# EAGLE board Panel (2) (EAGLE 9.1.2)
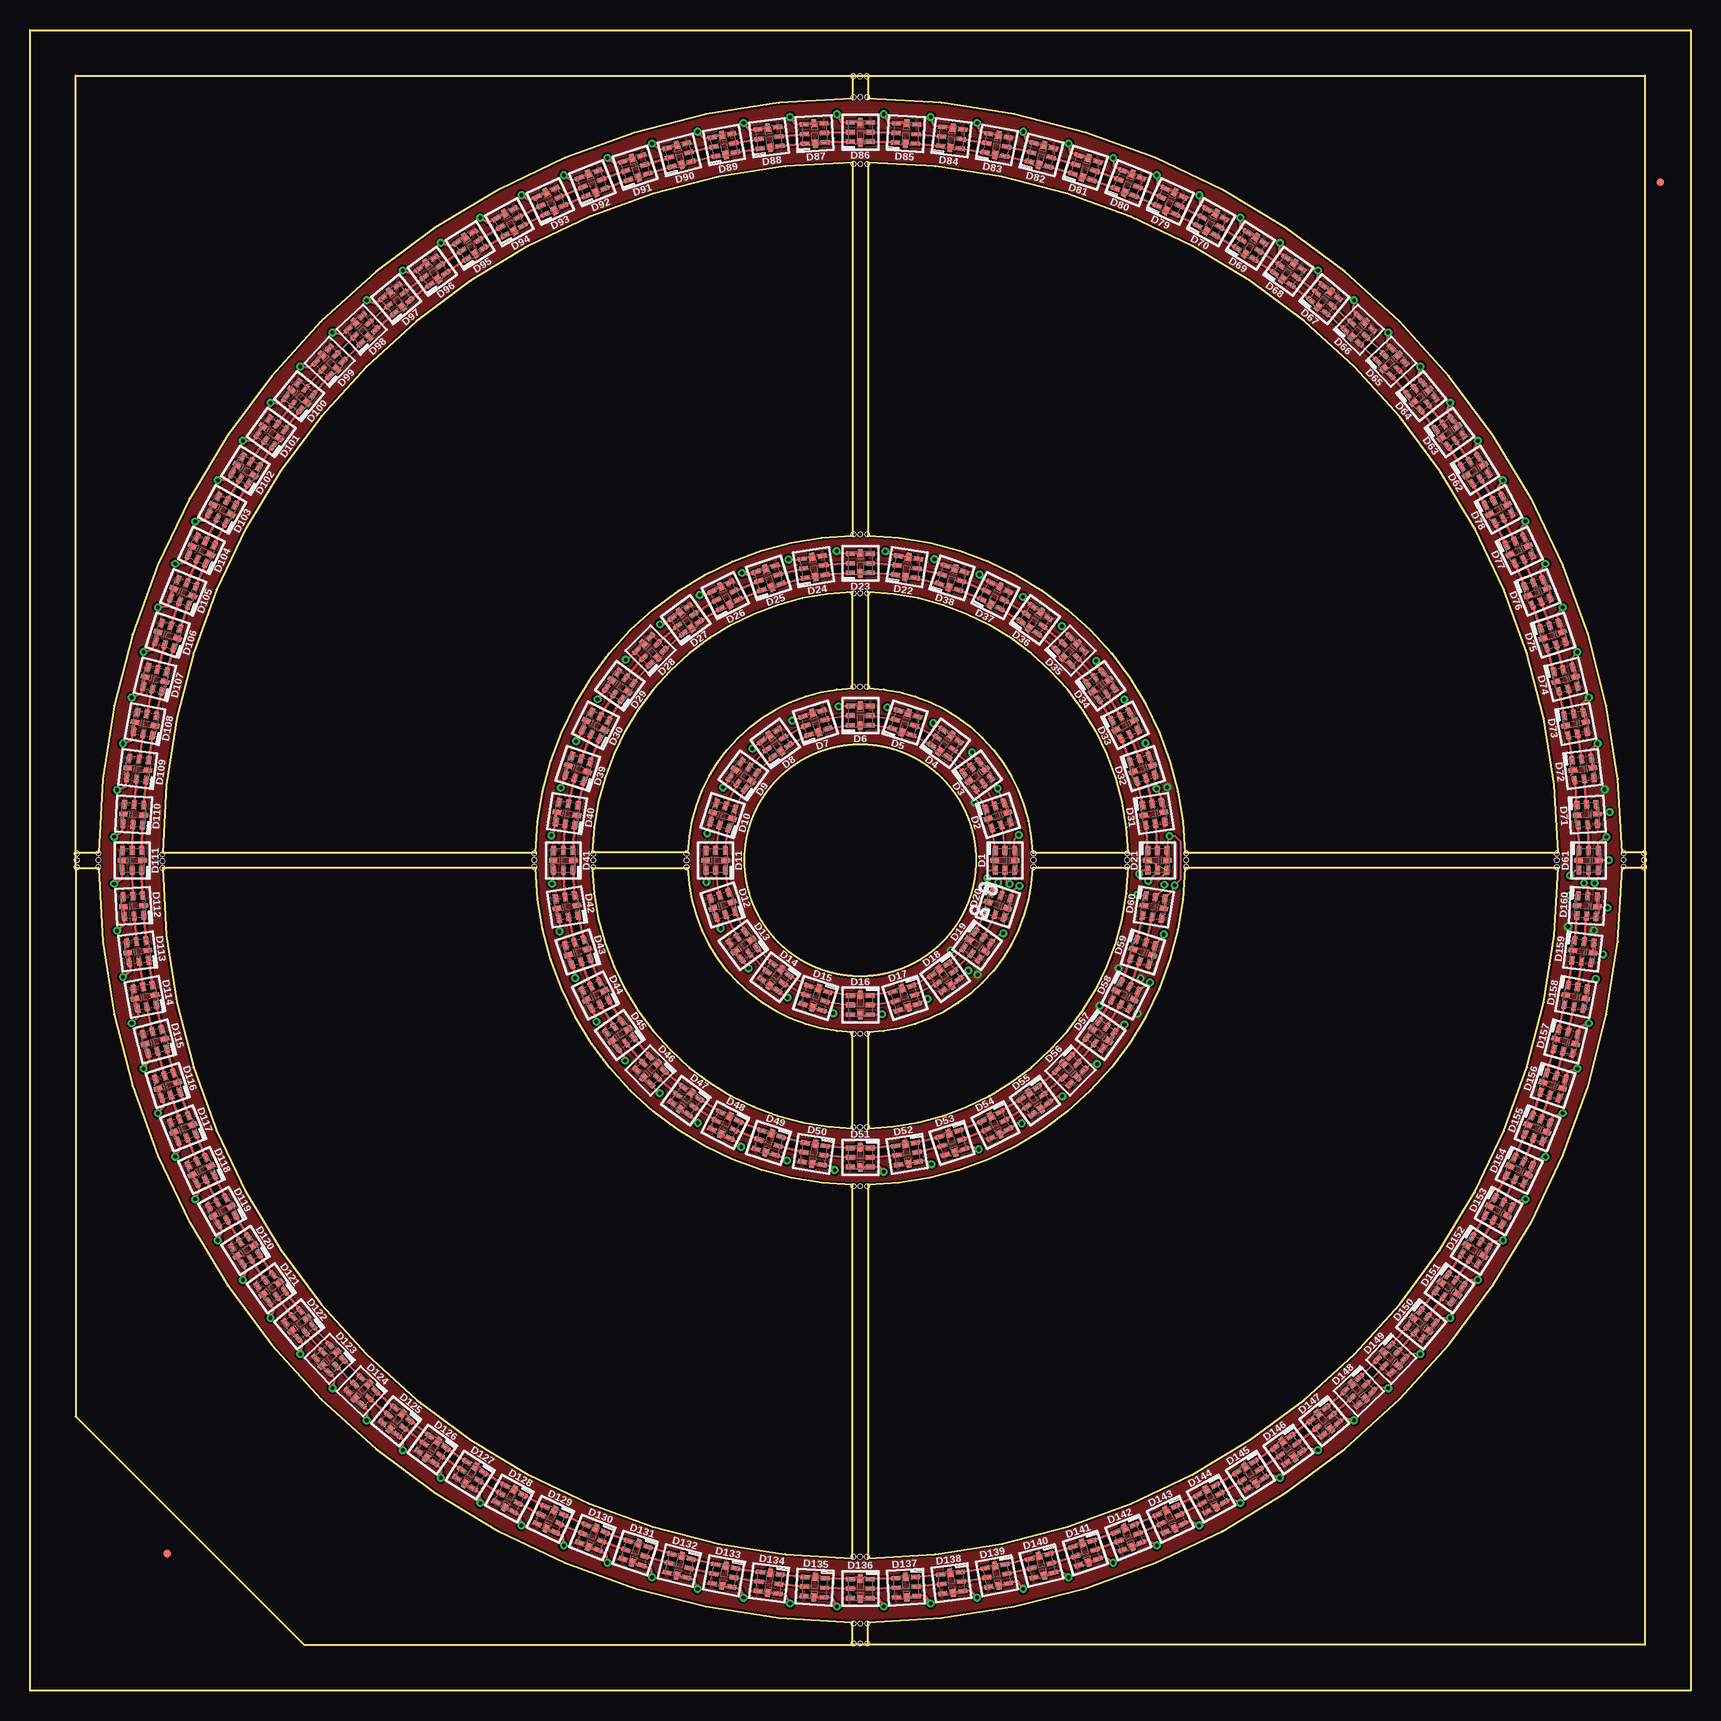
[diagram p0: board, top side]
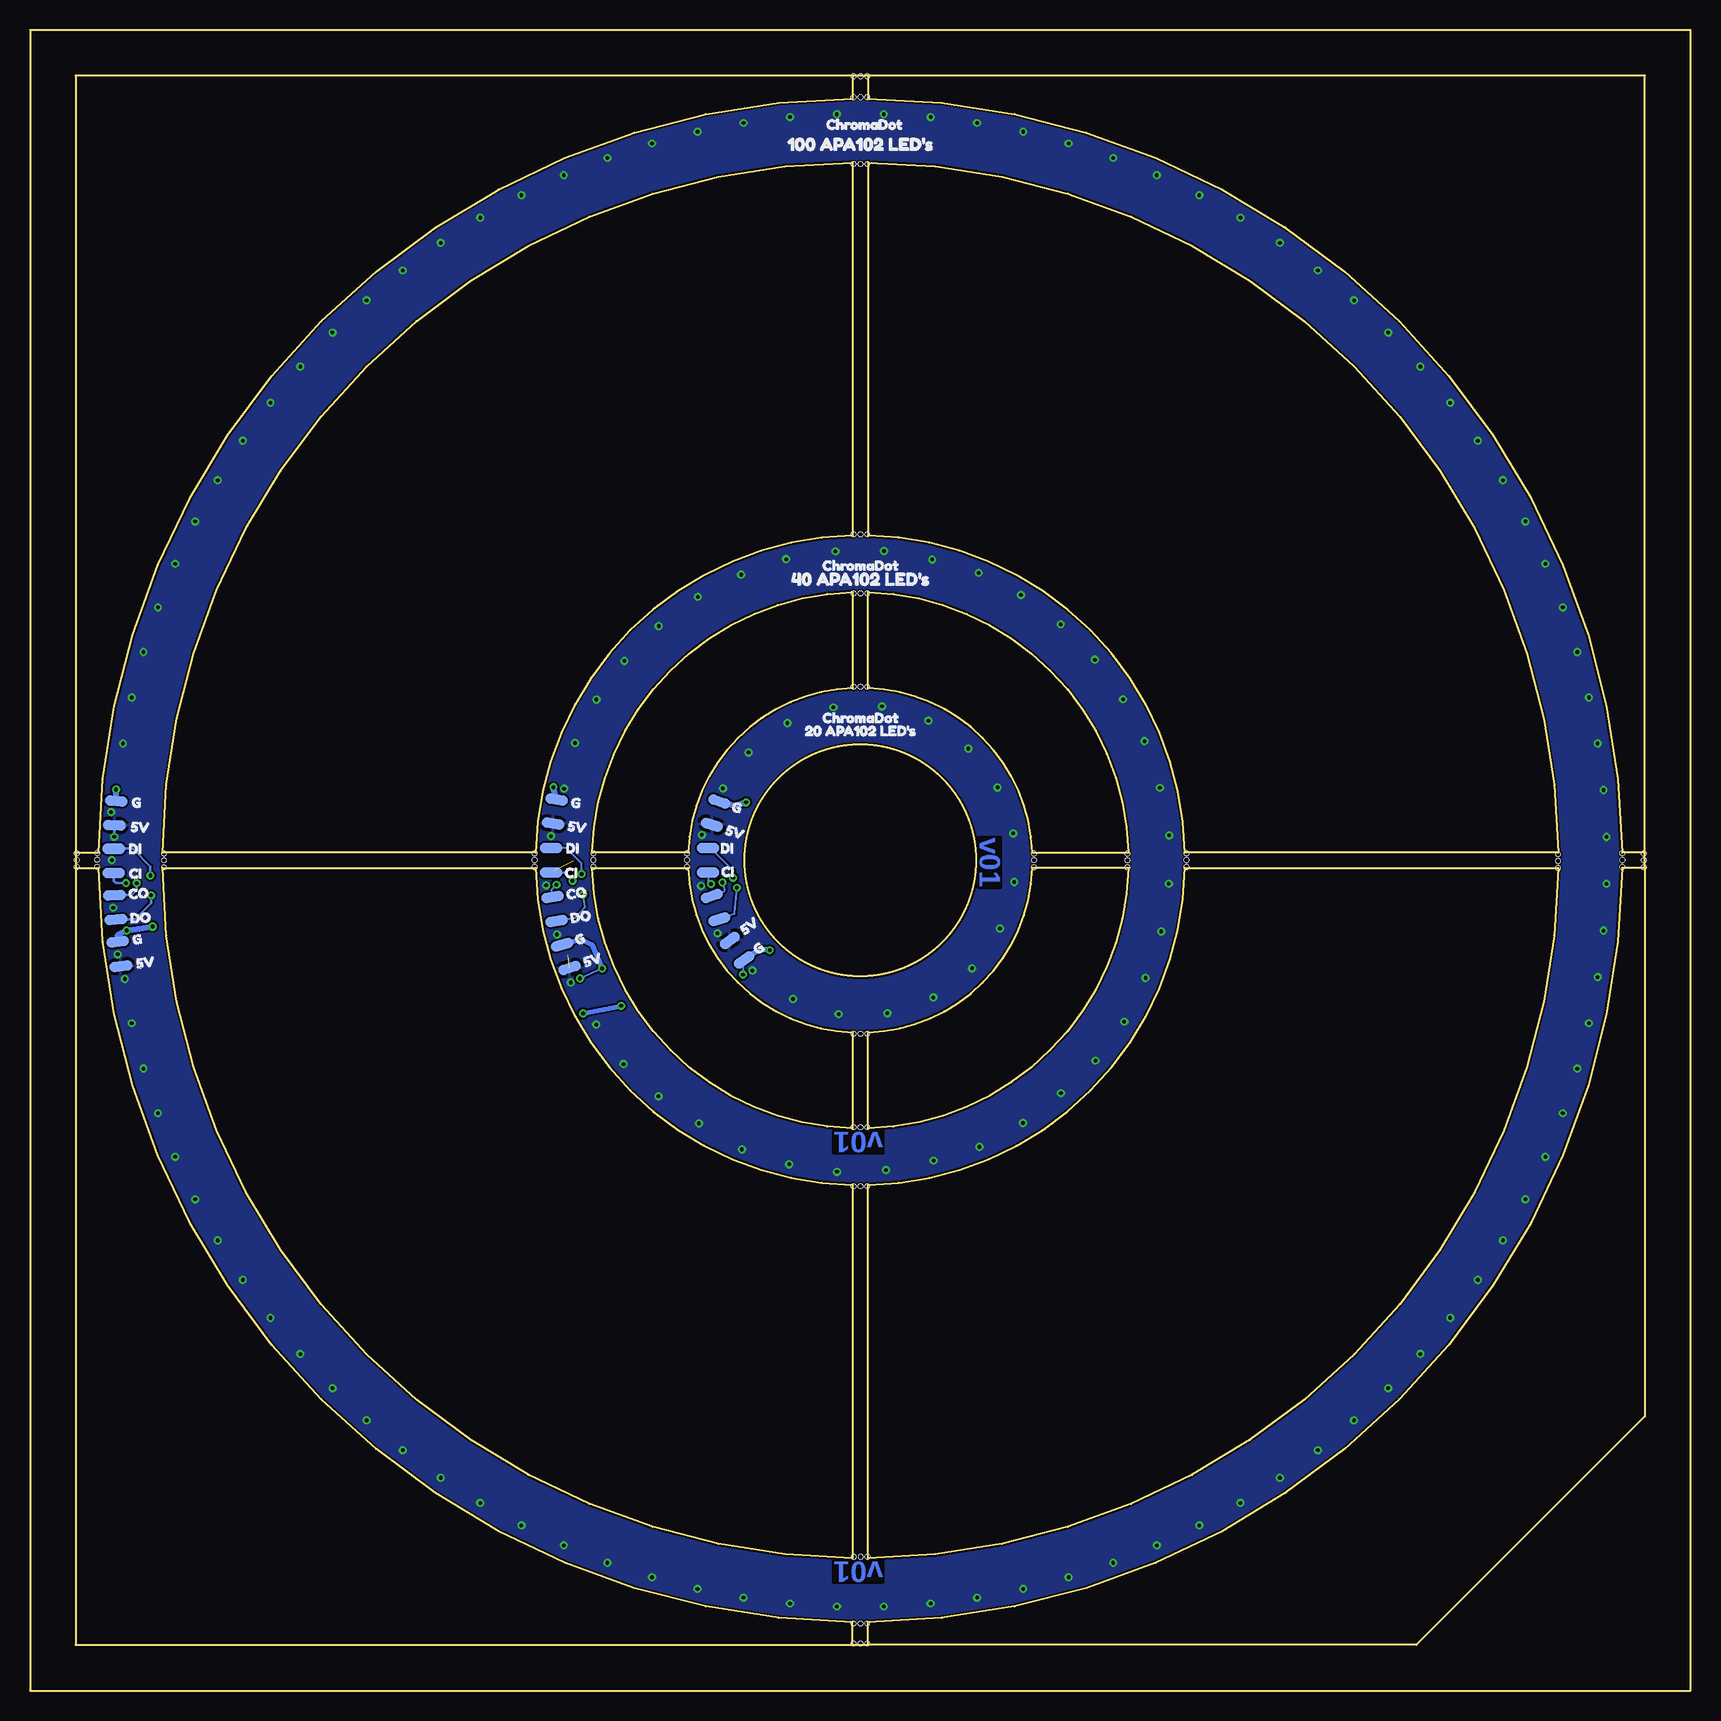
[diagram p1: board, bottom side, seen from below]

Size 138.43 x 138.43 mm. Coordinates in mm from the lower left corner, seen from the top.
Outline: 3.81,68.58 3.81,69.85
Outline: 3.81,69.85 3.81,134.62 68.58,134.62
Outline: 68.58,134.62 69.85,134.62
Outline: 69.85,134.62 134.62,134.62 134.62,69.85
Outline: 134.62,69.85 134.62,68.58
Outline: 134.62,68.58 134.62,3.81 69.85,3.81
Outline: 69.85,3.81 68.58,3.81
Outline: 3.81,69.85 5.71,69.85 arc-89 68.58,132.72 68.58,134.62
Outline: 3.81,68.58 5.71,68.58 arc89 68.58,5.71 68.58,3.81
Outline: 69.85,134.62 69.85,132.72 arc-89 132.72,69.85 134.62,69.85
Outline: 134.62,68.58 132.72,68.58 arc-89 69.85,5.71 69.85,3.81
Outline: 3.81,68.58 3.81,22.86 22.86,3.81 68.58,3.81
Outline: 0,138.43 138.43,138.43 138.43,0 0,0 0,138.43
Outline: 68.58,127.38 68.58,96.27 arc88 42.16,69.85 11.05,69.85 arc-89 68.58,127.38
Outline: 69.85,127.38 69.85,96.27 arc-88 96.27,69.85 127.38,69.85 arc89 69.85,127.38
Outline: 68.58,11.05 68.58,42.16 arc-88 42.16,68.58 11.05,68.58 arc89 68.58,11.05
Outline: 69.85,42.16 69.85,11.05 arc89 127.38,68.58 96.27,68.58 arc-88 69.85,42.16
Outline: 68.58,46.86 68.58,54.86 arc-86 54.86,68.58 46.86,68.58 arc87 68.58,46.86
Outline: 69.85,54.86 69.85,46.86 arc87 91.57,68.58 83.57,68.58 arc-86 69.85,54.86
Outline: 68.58,83.57 68.58,91.57 arc87 46.86,69.85 54.86,69.85 arc-86 68.58,83.57
Outline: 69.85,91.57 69.85,83.57 arc-86 83.57,69.85 91.57,69.85 arc87 69.85,91.57
Outline: circle at 69.22,69.22 radius 9.65
Copper layers (1*16): Top 0.035mm / dielectric 1.5mm / Bottom 0.035mm
Design rules "SparkFun-2-layer-PCBWay-LIMIT": minimum track width 6mil, minimum drill 0.3mm, track to track 6mil, track to pad 6mil, pad to pad 6mil, via to via 6mil, smd to smd 6mil, copper to edge 6mil, drill to drill 6mil, minimum pad ring 7mil, minimum via ring 7mil, stop-mask expansion 4mil, vias tented up to drill 25mil, thermal gap 10mil
Holes 0.38 mm at 11.05,69.72 11.05,69.16 11.05,68.58 5.7,69.8 5.7,69.24 5.7,68.66 42.04,69.8 42.04,69.24 42.04,68.66 46.95,69.79 46.95,69.23 46.95,68.64 54.74,69.79 54.74,69.23 54.74,68.64 83.65,69.8 83.65,69.24 83.65,68.66 91.47,69.8 91.47,69.24 91.47,68.66 96.37,69.8 96.37,69.24 96.37,68.66 127.27,69.79 127.27,69.23 127.27,68.64 132.83,69.82 132.83,69.27 132.83,68.68 134.54,69.8 134.54,69.24 134.54,68.66 68.64,54.76 69.2,54.76 69.79,54.76 68.63,46.96 69.19,46.96 69.77,46.96 68.64,42.05 69.2,42.05 69.79,42.05 68.62,11.15 69.18,11.15 69.76,11.15 68.64,5.6 69.2,5.6 69.79,5.6 68.64,3.94 69.2,3.94 69.79,3.94 3.9,69.77 3.9,69.22 3.9,68.63 68.63,83.68 69.19,83.68 69.77,83.68 68.64,91.47 69.2,91.47 69.79,91.47 68.64,96.39 69.2,96.39 69.79,96.39 68.64,127.27 69.2,127.27 69.79,127.27 68.64,132.83 69.2,132.83 69.79,132.83 68.63,134.57 69.19,134.57 69.77,134.57

## Footprints (pad centres in the part's own frame; a part is rotated, then mirrored left to right if it is on the bottom)
APA102-2020 = smd 0.7 x 0.4: CKI -0.85,0; CKO 0.85,0; GND -0.85,-0.8; SDI -0.85,0.8; SDO 0.85,0.8; VDD 0.85,-0.8 | smd 0.4 x 0.7: GNDPAD 0,0.85; VDDPAD 0,-0.85
FIDUCIAL-MICRO = smd 0.635 x 0.635: 1 0,0
DOUBLELEDPAD = smd 0.889 x 1.905: P$1 -1.016,0; P$2 1.016,0

## Placement (x,y rotation side)
D1  APA1022020  [APA102-2020]  81.28,69.22 90 top
D2  APA1022020  [APA102-2020]  80.7,72.95 108 top
D3  APA1022020  [APA102-2020]  78.97,76.3 126 top
D4  APA1022020  [APA102-2020]  76.3,78.97 144 top
D5  APA1022020  [APA102-2020]  72.95,80.7 162 top
D6  APA1022020  [APA102-2020]  69.22,81.28 180 top
D7  APA1022020  [APA102-2020]  65.48,80.7 198 top
D8  APA1022020  [APA102-2020]  62.13,78.97 216 top
D9  APA1022020  [APA102-2020]  59.46,76.3 234 top
D10  APA1022020  [APA102-2020]  57.73,72.95 252 top
D11  APA1022020  [APA102-2020]  57.15,69.22 270 top
D12  APA1022020  [APA102-2020]  57.73,65.48 288 top
D13  APA1022020  [APA102-2020]  59.46,62.13 306 top
D14  APA1022020  [APA102-2020]  62.13,59.46 324 top
D15  APA1022020  [APA102-2020]  65.48,57.73 342 top
D16  APA1022020  [APA102-2020]  69.22,57.15 0 top
D17  APA1022020  [APA102-2020]  72.95,57.73 18 top
D18  APA1022020  [APA102-2020]  76.3,59.46 36 top
D19  APA1022020  [APA102-2020]  78.97,62.13 54 top
D20  APA1022020  [APA102-2020]  80.7,65.48 72 top
D21  APA1022020  [APA102-2020]  93.98,69.22 90 top
D22  APA1022020  [APA102-2020]  73.1,93.68 171 top
D23  APA1022020  [APA102-2020]  69.22,93.98 180 top
D24  APA1022020  [APA102-2020]  65.33,93.68 189 top
D25  APA1022020  [APA102-2020]  61.57,92.76 198 top
D26  APA1022020  [APA102-2020]  57.96,91.29 207 top
D27  APA1022020  [APA102-2020]  54.66,89.26 216 top
D28  APA1022020  [APA102-2020]  51.71,86.72 225 top
D29  APA1022020  [APA102-2020]  49.17,83.77 234 top
D30  APA1022020  [APA102-2020]  47.14,80.47 243 top
D31  APA1022020  [APA102-2020]  93.68,73.1 99 top
D32  APA1022020  [APA102-2020]  92.76,76.86 108 top
D33  APA1022020  [APA102-2020]  91.29,80.47 117 top
D34  APA1022020  [APA102-2020]  89.26,83.77 126 top
D35  APA1022020  [APA102-2020]  86.72,86.72 135 top
D36  APA1022020  [APA102-2020]  83.77,89.26 144 top
D37  APA1022020  [APA102-2020]  80.47,91.29 153 top
D38  APA1022020  [APA102-2020]  76.86,92.76 162 top
D39  APA1022020  [APA102-2020]  45.67,76.86 252 top
D40  APA1022020  [APA102-2020]  44.75,73.1 261 top
D41  APA1022020  [APA102-2020]  44.45,69.22 270 top
D42  APA1022020  [APA102-2020]  44.75,65.33 279 top
D43  APA1022020  [APA102-2020]  45.67,61.57 288 top
D44  APA1022020  [APA102-2020]  47.14,57.96 297 top
D45  APA1022020  [APA102-2020]  49.17,54.66 306 top
D46  APA1022020  [APA102-2020]  51.71,51.71 315 top
D47  APA1022020  [APA102-2020]  54.66,49.17 324 top
D48  APA1022020  [APA102-2020]  57.96,47.14 333 top
D49  APA1022020  [APA102-2020]  61.57,45.67 342 top
D50  APA1022020  [APA102-2020]  65.33,44.75 351 top
D51  APA1022020  [APA102-2020]  69.22,44.45 0 top
D52  APA1022020  [APA102-2020]  73.1,44.75 9 top
D53  APA1022020  [APA102-2020]  76.86,45.67 18 top
D54  APA1022020  [APA102-2020]  80.47,47.14 27 top
D55  APA1022020  [APA102-2020]  83.77,49.17 36 top
D56  APA1022020  [APA102-2020]  86.72,51.71 45 top
D57  APA1022020  [APA102-2020]  89.26,54.66 54 top
D58  APA1022020  [APA102-2020]  91.29,57.96 63 top
D59  APA1022020  [APA102-2020]  92.76,61.57 72 top
D60  APA1022020  [APA102-2020]  93.68,65.33 81 top
D61  APA1022020  [APA102-2020]  129.92,69.22 90 top
D62  APA1022020  [APA102-2020]  120.47,101.74 122.4 top
D63  APA1022020  [APA102-2020]  118.33,104.9 126 top
D64  APA1022020  [APA102-2020]  115.99,107.91 129.6 top
D65  APA1022020  [APA102-2020]  113.47,110.77 133.2 top
D66  APA1022020  [APA102-2020]  110.77,113.47 136.8 top
D67  APA1022020  [APA102-2020]  107.91,115.99 140.4 top
D68  APA1022020  [APA102-2020]  104.9,118.33 144 top
D69  APA1022020  [APA102-2020]  101.74,120.47 147.6 top
D70  APA1022020  [APA102-2020]  98.46,122.41 151.2 top
D71  APA1022020  [APA102-2020]  129.8,73.03 93.6 top
D72  APA1022020  [APA102-2020]  129.44,76.82 97.2 top
D73  APA1022020  [APA102-2020]  128.85,80.59 100.8 top
D74  APA1022020  [APA102-2020]  128.01,84.31 104.4 top
D75  APA1022020  [APA102-2020]  126.95,87.98 108 top
D76  APA1022020  [APA102-2020]  125.66,91.56 111.6 top
D77  APA1022020  [APA102-2020]  124.14,95.06 115.2 top
D78  APA1022020  [APA102-2020]  122.41,98.46 118.8 top
D79  APA1022020  [APA102-2020]  95.06,124.14 154.8 top
D80  APA1022020  [APA102-2020]  91.56,125.66 158.4 top
D81  APA1022020  [APA102-2020]  87.98,126.95 162 top
D82  APA1022020  [APA102-2020]  84.31,128.01 165.6 top
D83  APA1022020  [APA102-2020]  80.59,128.85 169.2 top
D84  APA1022020  [APA102-2020]  76.82,129.44 172.8 top
D85  APA1022020  [APA102-2020]  73.03,129.8 176.4 top
D86  APA1022020  [APA102-2020]  69.22,129.92 180 top
D87  APA1022020  [APA102-2020]  65.4,129.8 183.6 top
D88  APA1022020  [APA102-2020]  61.61,129.44 187.2 top
D89  APA1022020  [APA102-2020]  57.84,128.85 190.8 top
D90  APA1022020  [APA102-2020]  54.12,128.01 194.4 top
D91  APA1022020  [APA102-2020]  50.45,126.95 198 top
D92  APA1022020  [APA102-2020]  46.87,125.66 201.6 top
D93  APA1022020  [APA102-2020]  43.37,124.14 205.2 top
D94  APA1022020  [APA102-2020]  39.97,122.41 208.8 top
D95  APA1022020  [APA102-2020]  36.69,120.47 212.4 top
D96  APA1022020  [APA102-2020]  33.53,118.33 216 top
D97  APA1022020  [APA102-2020]  30.52,115.99 219.6 top
D98  APA1022020  [APA102-2020]  27.66,113.47 223.2 top
D99  APA1022020  [APA102-2020]  24.96,110.77 226.8 top
D100  APA1022020  [APA102-2020]  22.44,107.91 230.4 top
D101  APA1022020  [APA102-2020]  20.1,104.9 234 top
D102  APA1022020  [APA102-2020]  17.96,101.74 237.6 top
D103  APA1022020  [APA102-2020]  16.02,98.46 241.2 top
D104  APA1022020  [APA102-2020]  14.29,95.06 244.8 top
D105  APA1022020  [APA102-2020]  12.77,91.56 248.4 top
D106  APA1022020  [APA102-2020]  11.48,87.98 252 top
D107  APA1022020  [APA102-2020]  10.42,84.31 255.6 top
D108  APA1022020  [APA102-2020]  9.58,80.59 259.2 top
D109  APA1022020  [APA102-2020]  8.99,76.82 262.8 top
D110  APA1022020  [APA102-2020]  8.63,73.03 266.4 top
D111  APA1022020  [APA102-2020]  8.51,69.22 270 top
D112  APA1022020  [APA102-2020]  8.63,65.4 273.6 top
D113  APA1022020  [APA102-2020]  8.99,61.61 277.2 top
D114  APA1022020  [APA102-2020]  9.58,57.84 280.8 top
D115  APA1022020  [APA102-2020]  10.42,54.12 284.4 top
D116  APA1022020  [APA102-2020]  11.48,50.45 288 top
D117  APA1022020  [APA102-2020]  12.77,46.87 291.6 top
D118  APA1022020  [APA102-2020]  14.29,43.37 295.2 top
D119  APA1022020  [APA102-2020]  16.02,39.97 298.8 top
D120  APA1022020  [APA102-2020]  17.96,36.69 302.4 top
D121  APA1022020  [APA102-2020]  20.1,33.53 306 top
D122  APA1022020  [APA102-2020]  22.44,30.52 309.6 top
D123  APA1022020  [APA102-2020]  24.96,27.66 313.2 top
D124  APA1022020  [APA102-2020]  27.66,24.96 316.8 top
D125  APA1022020  [APA102-2020]  30.52,22.44 320.4 top
D126  APA1022020  [APA102-2020]  33.53,20.1 324 top
D127  APA1022020  [APA102-2020]  36.69,17.96 327.6 top
D128  APA1022020  [APA102-2020]  39.97,16.02 331.2 top
D129  APA1022020  [APA102-2020]  43.37,14.29 334.8 top
D130  APA1022020  [APA102-2020]  46.87,12.77 338.4 top
D131  APA1022020  [APA102-2020]  50.45,11.48 342 top
D132  APA1022020  [APA102-2020]  54.12,10.42 345.6 top
D133  APA1022020  [APA102-2020]  57.84,9.58 349.2 top
D134  APA1022020  [APA102-2020]  61.61,8.99 352.8 top
D135  APA1022020  [APA102-2020]  65.4,8.63 356.4 top
D136  APA1022020  [APA102-2020]  69.22,8.51 0 top
D137  APA1022020  [APA102-2020]  73.03,8.63 3.6 top
D138  APA1022020  [APA102-2020]  76.82,8.99 7.2 top
D139  APA1022020  [APA102-2020]  80.59,9.58 10.8 top
D140  APA1022020  [APA102-2020]  84.31,10.42 14.4 top
D141  APA1022020  [APA102-2020]  87.98,11.48 18 top
D142  APA1022020  [APA102-2020]  91.56,12.77 21.6 top
D143  APA1022020  [APA102-2020]  95.06,14.29 25.2 top
D144  APA1022020  [APA102-2020]  98.46,16.02 28.8 top
D145  APA1022020  [APA102-2020]  101.74,17.96 32.4 top
D146  APA1022020  [APA102-2020]  104.9,20.1 36 top
D147  APA1022020  [APA102-2020]  107.91,22.44 39.6 top
D148  APA1022020  [APA102-2020]  110.77,24.96 43.2 top
D149  APA1022020  [APA102-2020]  113.47,27.66 46.8 top
D150  APA1022020  [APA102-2020]  115.99,30.52 50.4 top
D151  APA1022020  [APA102-2020]  118.33,33.53 54 top
D152  APA1022020  [APA102-2020]  120.47,36.69 57.6 top
D153  APA1022020  [APA102-2020]  122.41,39.97 61.2 top
D154  APA1022020  [APA102-2020]  124.14,43.37 64.8 top
D155  APA1022020  [APA102-2020]  125.66,46.87 68.4 top
D156  APA1022020  [APA102-2020]  126.95,50.45 72 top
D157  APA1022020  [APA102-2020]  128.01,54.12 75.6 top
D158  APA1022020  [APA102-2020]  128.85,57.84 79.2 top
D159  APA1022020  [APA102-2020]  129.44,61.61 82.8 top
D160  APA1022020  [APA102-2020]  129.8,65.4 86.4 top
E$1  [FIDUCIAL-MICRO]  135.89,125.73 0 top
E$2  [FIDUCIAL-MICRO]  11.43,11.43 0 top
FRAME3  FRAME-LETTER  [CREATIVE_COMMONS]  44.3,-7.3 0 top  (outside the outline)
J1  DOUBLE_LED_PAD  [DOUBLELEDPAD]  81.28,73.15 252 bottom
J2  DOUBLE_LED_PAD  [DOUBLELEDPAD]  81.92,69.22 270 bottom
J3  DOUBLE_LED_PAD  [DOUBLELEDPAD]  79.5,61.72 126 bottom
J4  DOUBLE_LED_PAD  [DOUBLELEDPAD]  81.28,65.28 108 bottom
J5  DOUBLE_LED_PAD  [DOUBLELEDPAD]  94.68,73.28 261 bottom
J6  DOUBLE_LED_PAD  [DOUBLELEDPAD]  95,69.23 270 bottom
J7  DOUBLE_LED_PAD  [DOUBLELEDPAD]  94.7,65.15 99 bottom
J8  DOUBLE_LED_PAD  [DOUBLELEDPAD]  93.76,61.21 288 bottom
J9  DOUBLE_LED_PAD  [DOUBLELEDPAD]  131.32,73.15 266.4 bottom
J10  DOUBLE_LED_PAD  [DOUBLELEDPAD]  131.44,69.16 270 bottom
J11  DOUBLE_LED_PAD  [DOUBLELEDPAD]  130.98,61.4 277.2 bottom
J12  DOUBLE_LED_PAD  [DOUBLELEDPAD]  131.33,65.3 93.6 bottom
U$1  [CHROMADOT5]  73.09,81.09 0 bottom
U$2  [20_APA102_LED#S6]  74.55,80.01 0 bottom
U$3  [5V6]  79.69,62.86 36 bottom
U$4  [5V6]  81.09,72.01 342 bottom
U$5  [G4]  80.58,73.98 342 bottom
U$6  [G4]  78.61,61.21 36 bottom
U$7  [DO3]  80.65,64.45 162 top
U$8  [CO1]  81.34,66.36 162 top
U$9  [CI6]  81.53,68.26 0 bottom
U$10  [DI4]  81.6,70.23 0 bottom
U$11  [CHROMADOT5]  73.09,93.79 0 bottom
U$12  [5V6]  92.96,60.45 18 bottom
U$13  [5V6]  94.3,72.2 352 bottom
U$14  [G4]  94.04,74.17 352 bottom
U$15  [G4]  93.66,62.29 18 bottom
U$16  [DO3]  94.11,64.26 9 bottom
U$17  [CO1]  94.42,66.23 9 bottom
U$18  [CI6]  94.59,68.17 0 bottom
U$19  [DI4]  94.49,70.23 0 bottom
U$20  [40_APA102_LED#S1]  75.88,92.65 0 bottom
U$21  [CHROMADOT5]  72.77,130.56 0 bottom
U$22  [5V6]  130.3,60.52 7.2 bottom
U$23  [5V6]  130.75,72.07 356.4 bottom
U$24  [G4]  130.68,74.1 356.4 bottom
U$25  [G4]  130.62,62.48 7.2 bottom
U$26  [DO3]  130.81,64.33 3.6 bottom
U$27  [CO1]  130.94,66.36 3.6 bottom
U$28  [CI6]  130.91,68.11 0 bottom
U$29  [DI4]  130.94,70.17 0 bottom
U$30  [100_APA102_LED#S0]  76.2,128.91 0 bottom

## Library data of the parts
D1-D160 = SparkFun-LED; PROD_ID: DIO-13883
E$1 E$2 FRAME3 = SparkFun-Aesthetics
J1-J12 = Andy
U$1 U$2 U$11 U$21 = buzzard_labels (22)
U$3-U$8 U$12-U$17 U$22-U$27 = buzzard_labels (25)
U$9 U$10 U$18 U$19 U$28 U$29 = buzzard_labels (26)
U$20 U$30 = buzzard_labels (28)

## Nets
5V: D1.VDD D1.VDDPAD D2.VDD D2.VDDPAD D3.VDD D3.VDDPAD D4.VDD D4.VDDPAD D5.VDD D5.VDDPAD D6.VDD D6.VDDPAD D7.VDD D7.VDDPAD D8.VDD D8.VDDPAD D9.VDD D9.VDDPAD D10.VDD D10.VDDPAD D11.VDD D11.VDDPAD D12.VDD D12.VDDPAD D13.VDD D13.VDDPAD D14.VDD D14.VDDPAD D15.VDD D15.VDDPAD D16.VDD D16.VDDPAD D17.VDD D17.VDDPAD D18.VDD D18.VDDPAD D19.VDD D19.VDDPAD D20.VDD D20.VDDPAD J1.P$2 J3.P$2
5V1: D21.VDD D21.VDDPAD D22.VDD D22.VDDPAD D23.VDD D23.VDDPAD D24.VDD D24.VDDPAD D25.VDD D25.VDDPAD D26.VDD D26.VDDPAD D27.VDD D27.VDDPAD D28.VDD D28.VDDPAD D29.VDD D29.VDDPAD D30.VDD D30.VDDPAD D31.VDD D31.VDDPAD D32.VDD D32.VDDPAD D33.VDD D33.VDDPAD D34.VDD D34.VDDPAD D35.VDD D35.VDDPAD D36.VDD D36.VDDPAD D37.VDD D37.VDDPAD D38.VDD D38.VDDPAD D39.VDD D39.VDDPAD D40.VDD D40.VDDPAD D41.VDD D41.VDDPAD D42.VDD D42.VDDPAD D43.VDD D43.VDDPAD D44.VDD D44.VDDPAD D45.VDD D45.VDDPAD D46.VDD D46.VDDPAD D47.VDD D47.VDDPAD D48.VDD D48.VDDPAD D49.VDD D49.VDDPAD D50.VDD D50.VDDPAD D51.VDD D51.VDDPAD D52.VDD D52.VDDPAD D53.VDD D53.VDDPAD D54.VDD D54.VDDPAD D55.VDD D55.VDDPAD D56.VDD D56.VDDPAD D57.VDD D57.VDDPAD D58.VDD D58.VDDPAD D59.VDD D59.VDDPAD D60.VDD D60.VDDPAD J5.P$2 J8.P$2
5V2: D61.VDD D61.VDDPAD D62.VDD D62.VDDPAD D63.VDD D63.VDDPAD D64.VDD D64.VDDPAD D65.VDD D65.VDDPAD D66.VDD D66.VDDPAD D67.VDD D67.VDDPAD D68.VDD D68.VDDPAD D69.VDD D69.VDDPAD D70.VDD D70.VDDPAD D71.VDD D71.VDDPAD D72.VDD D72.VDDPAD D73.VDD D73.VDDPAD D74.VDD D74.VDDPAD D75.VDD D75.VDDPAD D76.VDD D76.VDDPAD D77.VDD D77.VDDPAD D78.VDD D78.VDDPAD D79.VDD D79.VDDPAD D80.VDD D80.VDDPAD D81.VDD D81.VDDPAD D82.VDD D82.VDDPAD D83.VDD D83.VDDPAD D84.VDD D84.VDDPAD D85.VDD D85.VDDPAD D86.VDD D86.VDDPAD D87.VDD D87.VDDPAD D88.VDD D88.VDDPAD D89.VDD D89.VDDPAD D90.VDD D90.VDDPAD D91.VDD D91.VDDPAD D92.VDD D92.VDDPAD D93.VDD D93.VDDPAD D94.VDD D94.VDDPAD D95.VDD D95.VDDPAD D96.VDD D96.VDDPAD D97.VDD D97.VDDPAD D98.VDD D98.VDDPAD D99.VDD D99.VDDPAD D100.VDD D100.VDDPAD D101.VDD D101.VDDPAD D102.VDD D102.VDDPAD D103.VDD D103.VDDPAD D104.VDD D104.VDDPAD D105.VDD D105.VDDPAD D106.VDD D106.VDDPAD D107.VDD D107.VDDPAD D108.VDD D108.VDDPAD D109.VDD D109.VDDPAD D110.VDD D110.VDDPAD D111.VDD D111.VDDPAD D112.VDD D112.VDDPAD D113.VDD D113.VDDPAD D114.VDD D114.VDDPAD D115.VDD D115.VDDPAD D116.VDD D116.VDDPAD D117.VDD D117.VDDPAD D118.VDD D118.VDDPAD D119.VDD D119.VDDPAD D120.VDD D120.VDDPAD D121.VDD D121.VDDPAD D122.VDD D122.VDDPAD D123.VDD D123.VDDPAD D124.VDD D124.VDDPAD D125.VDD D125.VDDPAD D126.VDD D126.VDDPAD D127.VDD D127.VDDPAD D128.VDD D128.VDDPAD D129.VDD D129.VDDPAD D130.VDD D130.VDDPAD D131.VDD D131.VDDPAD D132.VDD D132.VDDPAD D133.VDD D133.VDDPAD D134.VDD D134.VDDPAD D135.VDD D135.VDDPAD D136.VDD D136.VDDPAD D137.VDD D137.VDDPAD D138.VDD D138.VDDPAD D139.VDD D139.VDDPAD D140.VDD D140.VDDPAD D141.VDD D141.VDDPAD D142.VDD D142.VDDPAD D143.VDD D143.VDDPAD D144.VDD D144.VDDPAD D145.VDD D145.VDDPAD D146.VDD D146.VDDPAD D147.VDD D147.VDDPAD D148.VDD D148.VDDPAD D149.VDD D149.VDDPAD D150.VDD D150.VDDPAD D151.VDD D151.VDDPAD D152.VDD D152.VDDPAD D153.VDD D153.VDDPAD D154.VDD D154.VDDPAD D155.VDD D155.VDDPAD D156.VDD D156.VDDPAD D157.VDD D157.VDDPAD D158.VDD D158.VDDPAD D159.VDD D159.VDDPAD D160.VDD D160.VDDPAD J9.P$2 J11.P$2
GND: D1.GND D1.GNDPAD D2.GND D2.GNDPAD D3.GND D3.GNDPAD D4.GND D4.GNDPAD D5.GND D5.GNDPAD D6.GND D6.GNDPAD D7.GND D7.GNDPAD D8.GND D8.GNDPAD D9.GND D9.GNDPAD D10.GND D10.GNDPAD D11.GND D11.GNDPAD D12.GND D12.GNDPAD D13.GND D13.GNDPAD D14.GND D14.GNDPAD D15.GND D15.GNDPAD D16.GND D16.GNDPAD D17.GND D17.GNDPAD D18.GND D18.GNDPAD D19.GND D19.GNDPAD D20.GND D20.GNDPAD J1.P$1 J3.P$1
GND1: D21.GND D21.GNDPAD D22.GND D22.GNDPAD D23.GND D23.GNDPAD D24.GND D24.GNDPAD D25.GND D25.GNDPAD D26.GND D26.GNDPAD D27.GND D27.GNDPAD D28.GND D28.GNDPAD D29.GND D29.GNDPAD D30.GND D30.GNDPAD D31.GND D31.GNDPAD D32.GND D32.GNDPAD D33.GND D33.GNDPAD D34.GND D34.GNDPAD D35.GND D35.GNDPAD D36.GND D36.GNDPAD D37.GND D37.GNDPAD D38.GND D38.GNDPAD D39.GND D39.GNDPAD D40.GND D40.GNDPAD D41.GND D41.GNDPAD D42.GND D42.GNDPAD D43.GND D43.GNDPAD D44.GND D44.GNDPAD D45.GND D45.GNDPAD D46.GND D46.GNDPAD D47.GND D47.GNDPAD D48.GND D48.GNDPAD D49.GND D49.GNDPAD D50.GND D50.GNDPAD D51.GND D51.GNDPAD D52.GND D52.GNDPAD D53.GND D53.GNDPAD D54.GND D54.GNDPAD D55.GND D55.GNDPAD D56.GND D56.GNDPAD D57.GND D57.GNDPAD D58.GND D58.GNDPAD D59.GND D59.GNDPAD D60.GND D60.GNDPAD J5.P$1 J8.P$1
GND2: D61.GND D61.GNDPAD D62.GND D62.GNDPAD D63.GND D63.GNDPAD D64.GND D64.GNDPAD D65.GND D65.GNDPAD D66.GND D66.GNDPAD D67.GND D67.GNDPAD D68.GND D68.GNDPAD D69.GND D69.GNDPAD D70.GND D70.GNDPAD D71.GND D71.GNDPAD D72.GND D72.GNDPAD D73.GND D73.GNDPAD D74.GND D74.GNDPAD D75.GND D75.GNDPAD D76.GND D76.GNDPAD D77.GND D77.GNDPAD D78.GND D78.GNDPAD D79.GND D79.GNDPAD D80.GND D80.GNDPAD D81.GND D81.GNDPAD D82.GND D82.GNDPAD D83.GND D83.GNDPAD D84.GND D84.GNDPAD D85.GND D85.GNDPAD D86.GND D86.GNDPAD D87.GND D87.GNDPAD D88.GND D88.GNDPAD D89.GND D89.GNDPAD D90.GND D90.GNDPAD D91.GND D91.GNDPAD D92.GND D92.GNDPAD D93.GND D93.GNDPAD D94.GND D94.GNDPAD D95.GND D95.GNDPAD D96.GND D96.GNDPAD D97.GND D97.GNDPAD D98.GND D98.GNDPAD D99.GND D99.GNDPAD D100.GND D100.GNDPAD D101.GND D101.GNDPAD D102.GND D102.GNDPAD D103.GND D103.GNDPAD D104.GND D104.GNDPAD D105.GND D105.GNDPAD D106.GND D106.GNDPAD D107.GND D107.GNDPAD D108.GND D108.GNDPAD D109.GND D109.GNDPAD D110.GND D110.GNDPAD D111.GND D111.GNDPAD D112.GND D112.GNDPAD D113.GND D113.GNDPAD D114.GND D114.GNDPAD D115.GND D115.GNDPAD D116.GND D116.GNDPAD D117.GND D117.GNDPAD D118.GND D118.GNDPAD D119.GND D119.GNDPAD D120.GND D120.GNDPAD D121.GND D121.GNDPAD D122.GND D122.GNDPAD D123.GND D123.GNDPAD D124.GND D124.GNDPAD D125.GND D125.GNDPAD D126.GND D126.GNDPAD D127.GND D127.GNDPAD D128.GND D128.GNDPAD D129.GND D129.GNDPAD D130.GND D130.GNDPAD D131.GND D131.GNDPAD D132.GND D132.GNDPAD D133.GND D133.GNDPAD D134.GND D134.GNDPAD D135.GND D135.GNDPAD D136.GND D136.GNDPAD D137.GND D137.GNDPAD D138.GND D138.GNDPAD D139.GND D139.GNDPAD D140.GND D140.GNDPAD D141.GND D141.GNDPAD D142.GND D142.GNDPAD D143.GND D143.GNDPAD D144.GND D144.GNDPAD D145.GND D145.GNDPAD D146.GND D146.GNDPAD D147.GND D147.GNDPAD D148.GND D148.GNDPAD D149.GND D149.GNDPAD D150.GND D150.GNDPAD D151.GND D151.GNDPAD D152.GND D152.GNDPAD D153.GND D153.GNDPAD D154.GND D154.GNDPAD D155.GND D155.GNDPAD D156.GND D156.GNDPAD D157.GND D157.GNDPAD D158.GND D158.GNDPAD D159.GND D159.GNDPAD D160.GND D160.GNDPAD J9.P$1 J11.P$1
N$1: D4.CKO D5.CKI
N$2: D1.CKI J2.P$2
N$3: D1.SDI J2.P$1
N$4: D1.CKO D2.CKI
N$5: D1.SDO D2.SDI
N$6: D2.CKO D3.CKI
N$7: D2.SDO D3.SDI
N$8: D3.CKO D4.CKI
N$9: D3.SDO D4.SDI
N$10: D4.SDO D5.SDI
N$11: D5.CKO D6.CKI
N$12: D5.SDO D6.SDI
N$13: D6.CKO D7.CKI
N$14: D6.SDO D7.SDI
N$15: D7.CKO D8.CKI
N$16: D7.SDO D8.SDI
N$17: D8.CKO D9.CKI
N$18: D8.SDO D9.SDI
N$19: D9.CKO D10.CKI
N$20: D9.SDO D10.SDI
N$21: D10.CKO D11.CKI
N$22: D10.SDO D11.SDI
N$23: D11.CKO D12.CKI
N$24: D11.SDO D12.SDI
N$25: D12.CKO D13.CKI
N$26: D12.SDO D13.SDI
N$27: D13.CKO D14.CKI
N$28: D13.SDO D14.SDI
N$29: D14.CKO D15.CKI
N$30: D14.SDO D15.SDI
N$31: D15.CKO D16.CKI
N$32: D15.SDO D16.SDI
N$33: D16.CKO D17.CKI
N$34: D16.SDO D17.SDI
N$35: D17.CKO D18.CKI
N$36: D17.SDO D18.SDI
N$37: D18.CKO D19.CKI
N$38: D18.SDO D19.SDI
N$39: D19.CKO D20.CKI
N$40: D19.SDO D20.SDI
N$41: D20.CKO J4.P$2
N$42: D20.SDO J4.P$1
N$43: D21.CKI J6.P$2
N$44: D21.SDI J6.P$1
N$45: D21.CKO D31.CKI
N$46: D21.SDO D31.SDI
N$47: D31.CKO D32.CKI
N$48: D31.SDO D32.SDI
N$49: D32.CKO D33.CKI
N$50: D32.SDO D33.SDI
N$51: D33.CKO D34.CKI
N$52: D33.SDO D34.SDI
N$53: D34.CKO D35.CKI
N$54: D34.SDO D35.SDI
N$55: D35.CKO D36.CKI
N$56: D35.SDO D36.SDI
N$57: D36.CKO D37.CKI
N$58: D36.SDO D37.SDI
N$59: D22.CKI D38.CKO
N$60: D22.SDI D38.SDO
N$61: D22.CKO D23.CKI
N$62: D22.SDO D23.SDI
N$63: D23.CKO D24.CKI
N$64: D23.SDO D24.SDI
N$65: D24.CKO D25.CKI
N$66: D24.SDO D25.SDI
N$67: D25.CKO D26.CKI
N$68: D25.SDO D26.SDI
N$69: D26.CKO D27.CKI
N$70: D26.SDO D27.SDI
N$71: D27.CKO D28.CKI
N$72: D27.SDO D28.SDI
N$73: D29.CKO D30.CKI
N$74: D29.SDO D30.SDI
N$75: D30.SDO D39.SDI
N$76: D39.CKO D40.CKI
N$77: D39.SDO D40.SDI
N$78: D30.CKO D39.CKI
N$79: D40.CKO D41.CKI
N$80: D40.SDO D41.SDI
N$81: D28.SDO D29.SDI
N$82: D28.CKO D29.CKI
N$83: D37.SDO D38.SDI
N$84: D41.CKO D42.CKI
N$85: D41.SDO D42.SDI
N$86: D42.CKO D43.CKI
N$87: D42.SDO D43.SDI
N$88: D43.CKO D44.CKI
N$89: D43.SDO D44.SDI
N$90: D45.CKO D46.CKI
N$91: D45.SDO D46.SDI
N$92: D46.CKO D47.CKI
N$93: D46.SDO D47.SDI
N$94: D47.CKO D48.CKI
N$95: D47.SDO D48.SDI
N$96: D48.CKO D49.CKI
N$97: D48.SDO D49.SDI
N$98: D49.CKO D50.CKI
N$99: D49.SDO D50.SDI
N$100: D50.CKO D51.CKI
N$101: D50.SDO D51.SDI
N$102: D51.CKO D52.CKI
N$103: D51.SDO D52.SDI
N$104: D53.CKO D54.CKI
N$105: D53.SDO D54.SDI
N$106: D54.CKO D55.CKI
N$107: D54.SDO D55.SDI
N$108: D55.CKO D56.CKI
N$109: D55.SDO D56.SDI
N$110: D56.CKO D57.CKI
N$111: D56.SDO D57.SDI
N$112: D57.CKO D58.CKI
N$113: D57.SDO D58.SDI
N$114: D58.CKO D59.CKI
N$115: D58.SDO D59.SDI
N$116: D59.CKO D60.CKI
N$117: D59.SDO D60.SDI
N$118: D37.CKO D38.CKI
N$119: D44.CKO D45.CKI
N$120: D44.SDO D45.SDI
N$121: D52.SDO D53.SDI
N$122: D52.CKO D53.CKI
N$123: D61.CKI J10.P$2
N$124: D61.SDI J10.P$1
N$125: D61.CKO D71.CKI
N$126: D61.SDO D71.SDI
N$127: D71.CKO D72.CKI
N$128: D71.SDO D72.SDI
N$129: D72.CKO D73.CKI
N$130: D72.SDO D73.SDI
N$131: D73.CKO D74.CKI
N$132: D73.SDO D74.SDI
N$133: D60.CKO J7.P$2
N$134: D60.SDO J7.P$1
N$135: D74.CKO D75.CKI
N$136: D74.SDO D75.SDI
N$137: D75.CKO D76.CKI
N$138: D75.SDO D76.SDI
N$139: D76.CKO D77.CKI
N$140: D76.SDO D77.SDI
N$141: D62.CKI D78.CKO
N$142: D62.SDI D78.SDO
N$143: D62.CKO D63.CKI
N$144: D62.SDO D63.SDI
N$145: D63.CKO D64.CKI
N$146: D63.SDO D64.SDI
N$147: D64.CKO D65.CKI
N$148: D64.SDO D65.SDI
N$149: D65.CKO D66.CKI
N$150: D65.SDO D66.SDI
N$151: D66.CKO D67.CKI
N$152: D66.SDO D67.SDI
N$153: D67.CKO D68.CKI
N$154: D67.SDO D68.SDI
N$155: D69.CKO D70.CKI
N$156: D69.SDO D70.SDI
N$157: D70.SDO D79.SDI
N$158: D79.CKO D80.CKI
N$159: D79.SDO D80.SDI
N$160: D70.CKO D79.CKI
N$161: D77.CKO D78.CKI
N$162: D77.SDO D78.SDI
N$163: D68.SDO D69.SDI
N$164: D68.CKO D69.CKI
N$165: D81.CKO D82.CKI
N$166: D81.SDO D82.SDI
N$167: D82.CKO D83.CKI
N$168: D82.SDO D83.SDI
N$169: D83.CKO D84.CKI
N$170: D83.SDO D84.SDI
N$171: D84.CKO D85.CKI
N$172: D84.SDO D85.SDI
N$173: D85.CKO D86.CKI
N$174: D85.SDO D86.SDI
N$175: D86.CKO D87.CKI
N$176: D86.SDO D87.SDI
N$177: D87.CKO D88.CKI
N$178: D87.SDO D88.SDI
N$179: D89.CKO D90.CKI
N$180: D89.SDO D90.SDI
N$181: D90.CKO D91.CKI
N$182: D90.SDO D91.SDI
N$183: D91.CKO D92.CKI
N$184: D91.SDO D92.SDI
N$185: D92.CKO D93.CKI
N$186: D92.SDO D93.SDI
N$187: D93.CKO D94.CKI
N$188: D93.SDO D94.SDI
N$189: D94.CKO D95.CKI
N$190: D94.SDO D95.SDI
N$191: D95.CKO D96.CKI
N$192: D95.SDO D96.SDI
N$193: D97.CKO D98.CKI
N$194: D97.SDO D98.SDI
N$195: D98.SDO D99.SDI
N$196: D99.CKO D100.CKI
N$197: D99.SDO D100.SDI
N$198: D98.CKO D99.CKI
N$199: D88.CKO D89.CKI
N$200: D88.SDO D89.SDI
N$201: D96.SDO D97.SDI
N$202: D96.CKO D97.CKI
N$203: D101.CKO D102.CKI
N$204: D101.SDO D102.SDI
N$205: D102.CKO D103.CKI
N$206: D102.SDO D103.SDI
N$207: D103.CKO D104.CKI
N$208: D103.SDO D104.SDI
N$209: D104.CKO D105.CKI
N$210: D104.SDO D105.SDI
N$211: D105.CKO D106.CKI
N$212: D105.SDO D106.SDI
N$213: D106.CKO D107.CKI
N$214: D106.SDO D107.SDI
N$215: D107.CKO D108.CKI
N$216: D107.SDO D108.SDI
N$217: D109.CKO D110.CKI
N$218: D109.SDO D110.SDI
N$219: D110.CKO D111.CKI
N$220: D110.SDO D111.SDI
N$221: D111.CKO D112.CKI
N$222: D111.SDO D112.SDI
N$223: D112.CKO D113.CKI
N$224: D112.SDO D113.SDI
N$225: D113.CKO D114.CKI
N$226: D113.SDO D114.SDI
N$227: D114.CKO D115.CKI
N$228: D114.SDO D115.SDI
N$229: D115.CKO D116.CKI
N$230: D115.SDO D116.SDI
N$231: D117.CKO D118.CKI
N$232: D117.SDO D118.SDI
N$233: D118.SDO D119.SDI
N$234: D119.CKO D120.CKI
N$235: D119.SDO D120.SDI
N$236: D118.CKO D119.CKI
N$237: D108.CKO D109.CKI
N$238: D108.SDO D109.SDI
N$239: D116.SDO D117.SDI
N$240: D116.CKO D117.CKI
N$241: D121.CKO D122.CKI
N$242: D121.SDO D122.SDI
N$243: D122.CKO D123.CKI
N$244: D122.SDO D123.SDI
N$245: D123.CKO D124.CKI
N$246: D123.SDO D124.SDI
N$247: D124.CKO D125.CKI
N$248: D124.SDO D125.SDI
N$249: D125.CKO D126.CKI
N$250: D125.SDO D126.SDI
N$251: D126.CKO D127.CKI
N$252: D126.SDO D127.SDI
N$253: D127.CKO D128.CKI
N$254: D127.SDO D128.SDI
N$255: D129.CKO D130.CKI
N$256: D129.SDO D130.SDI
N$257: D130.CKO D131.CKI
N$258: D130.SDO D131.SDI
N$259: D131.CKO D132.CKI
N$260: D131.SDO D132.SDI
N$261: D132.CKO D133.CKI
N$262: D132.SDO D133.SDI
N$263: D133.CKO D134.CKI
N$264: D133.SDO D134.SDI
N$265: D134.CKO D135.CKI
N$266: D134.SDO D135.SDI
N$267: D135.CKO D136.CKI
N$268: D135.SDO D136.SDI
N$269: D137.CKO D138.CKI
N$270: D137.SDO D138.SDI
N$271: D138.SDO D139.SDI
N$272: D139.CKO D140.CKI
N$273: D139.SDO D140.SDI
N$274: D138.CKO D139.CKI
N$275: D128.CKO D129.CKI
N$276: D128.SDO D129.SDI
N$277: D136.SDO D137.SDI
N$278: D136.CKO D137.CKI
N$279: D80.CKO D81.CKI
N$280: D80.SDO D81.SDI
N$281: D100.CKO D101.CKI
N$282: D100.SDO D101.SDI
N$283: D120.CKO D121.CKI
N$284: D120.SDO D121.SDI
N$285: D141.CKO D142.CKI
N$286: D141.SDO D142.SDI
N$287: D142.CKO D143.CKI
N$288: D142.SDO D143.SDI
N$289: D143.CKO D144.CKI
N$290: D143.SDO D144.SDI
N$291: D144.CKO D145.CKI
N$292: D144.SDO D145.SDI
N$293: D145.CKO D146.CKI
N$294: D145.SDO D146.SDI
N$295: D146.CKO D147.CKI
N$296: D146.SDO D147.SDI
N$297: D147.CKO D148.CKI
N$298: D147.SDO D148.SDI
N$299: D149.CKO D150.CKI
N$300: D149.SDO D150.SDI
N$301: D150.CKO D151.CKI
N$302: D150.SDO D151.SDI
N$303: D151.CKO D152.CKI
N$304: D151.SDO D152.SDI
N$305: D152.CKO D153.CKI
N$306: D152.SDO D153.SDI
N$307: D153.CKO D154.CKI
N$308: D153.SDO D154.SDI
N$309: D154.CKO D155.CKI
N$310: D154.SDO D155.SDI
N$311: D155.CKO D156.CKI
N$312: D155.SDO D156.SDI
N$313: D157.CKO D158.CKI
N$314: D157.SDO D158.SDI
N$315: D158.SDO D159.SDI
N$316: D159.CKO D160.CKI
N$317: D159.SDO D160.SDI
N$318: D158.CKO D159.CKI
N$319: D148.CKO D149.CKI
N$320: D148.SDO D149.SDI
N$321: D156.SDO D157.SDI
N$322: D156.CKO D157.CKI
N$323: D160.SDO J12.P$1
N$324: D160.CKO J12.P$2
N$325: D140.CKO D141.CKI
N$326: D140.SDO D141.SDI

## Tracks (layer width: path | path; a pad name or v marks a point on that pad's centre or on a via)
5V  (via drill 0.3)
  Top 0.178: 80.89,63.13 80.86,63.1 D19.VDD D19.VDDPAD | 80.89,63.13 v81.14,63.13 | v82.48,67.09 81.92,66.67 D20.VDD D20.VDDPAD | v82.42,71.34 82.08,70.99 D1.VDD D1.VDDPAD | v81.14,63.13 80.89,63.13 | v80.67,75.21 D2.VDD D2.VDDPAD | D3.VDDPAD D3.VDD v78.53,78.21 | v75.3,80.65 D4.VDD D4.VDDPAD | v71.46,81.97 D5.VDD D5.VDDPAD | D6.VDDPAD D6.VDD v67.41,82.04 | v63.54,80.86 D7.VDD D7.VDDPAD | v60.22,78.53 D8.VDD D8.VDDPAD | D9.VDDPAD D9.VDD v57.78,75.3 | v56.46,71.46 D10.VDD D10.VDDPAD | v56.39,67.41 D11.VDD D11.VDDPAD | D12.VDDPAD D12.VDD v57.57,63.54 | D13.VDDPAD D13.VDD v59.9,60.22 | D14.VDDPAD D14.VDD v63.13,57.78 | D15.VDDPAD D15.VDD v66.97,56.46 | D16.VDDPAD D16.VDD v71.02,56.39 | v74.83,57.66 D17.VDD D17.VDDPAD | D18.VDDPAD D18.VDD v78.21,60.02
  pour Bottom: 69.28,83.57 arc-90 83.6,69.25 arc-90 69.22,54.86 arc-90 54.9,69.18 arc-90
5V1  (via drill 0.3)  (1 unrouted)
  Top 0.152: v94.51,63.04 D59.VDD | D60.VDDPAD D60.VDD 95.08,66.53 v95.42,67.13 95.89,67.6 95.89,70.8 95.44,71.25 95.02,71.25 v95,71.23 D21.VDD
  Top 0.203: D50.VDDPAD D50.VDD 66.79,43.74 v67.07,43.39 | D49.VDDPAD D49.VDD 63.05,44.32 v63.1,44.18 | D48.VDDPAD D48.VDD 59.17,45.58 v59.28,45.33 | D47.VDDPAD D47.VDD 55.65,47.4 v55.66,47.32 | D46.VDDPAD D46.VDD v52.5,49.8 | D45.VDDPAD D45.VDD 49.62,52.74 v49.61,52.51 | D44.VDDPAD D44.VDD 47.27,55.96 v47.22,55.76 | D43.VDDPAD D43.VDD 45.5,59.52 v45.44,59.41 | D42.VDDPAD D42.VDD 44.24,63.45 v44.13,63.29 | D41.VDDPAD D41.VDD 43.61,67.38 v43.51,67.26 | D40.VDDPAD D40.VDD 43.62,71.45 v43.46,71.3 | D39.VDDPAD D39.VDD 44.28,75.3 v44.24,75.27 | D37.VDDPAD D37.VDD 79.27,92.8 v79.15,93.04 | D38.VDDPAD D38.VDD 75.58,94.04 v75.39,94.32 | D36.VDDPAD D36.VDD 82.83,90.97 v82.77,91.18 | D35.VDDPAD D35.VDD 86.01,88.55 v86.02,88.74 | D34.VDDPAD D34.VDD 88.87,85.61 v88.89,85.84 | D33.VDDPAD D33.VDD 91.18,82.41 v91.21,82.62 | D32.VDDPAD D32.VDD 92.96,78.92 v92.99,79 | D31.VDDPAD D31.VDD 94.23,74.68 v93.91,75.19 | D21.VDD D21.VDDPAD | D59.VDD D59.VDDPAD | D58.VDDPAD D58.VDD v93.36,59.03 | D57.VDDPAD D57.VDD 90.84,55.42 v91.23,55.52 | D56.VDDPAD D56.VDD 88.39,52.2 v88.95,52.23 | D55.VDDPAD D55.VDD 85.72,49.57 v86.05,49.54 | D54.VDDPAD D54.VDD 82.46,47.36 v82.67,47.28 | D53.VDDPAD D53.VDD 78.55,45.34 v79.08,45.12 | D52.VDDPAD D52.VDD 74.68,44.2 v75.14,43.88 | v71.3,94.97 71.45,94.81 D22.VDD D22.VDDPAD | v67.24,94.99 67.42,94.82 D23.VDD D23.VDDPAD | D24.VDDPAD D24.VDD 63.75,94.23 v63.22,94.3 | D25.VDDPAD D25.VDD 59.75,93.03 v59.35,93.18 | D26.VDDPAD D26.VDD 56.39,91.38 v55.83,91.34 | D27.VDDPAD D27.VDD 52.81,88.86 v52.51,88.89 | D28.VDDPAD D28.VDD 49.81,85.95 v49.66,85.93 | D29.VDDPAD D29.VDD v47.31,82.64 | D30.VDDPAD D30.VDD 45.59,79.18 v45.52,79.15
  Top 0.203: D51.VDDPAD D51.VDD 70.8,43.69 v71.16,43.25
  pour Bottom: 69.22,96.27 arc-90 96.27,69.22 arc-270 69.15,96.27 arc-179
5V2  (via drill 0.3)
  Top 0.203: v131.6,69.23 D61.VDDPAD D61.VDD 130.75,70.68 v131.41,71.17 | D71.VDD D71.VDDPAD v131.68,73.23 | v131.49,65.26 D160.VDDPAD D160.VDD | D159.VDD D159.VDDPAD v131.12,61.38 | D72.VDDPAD D72.VDD 130.05,78.42 v130.68,78.95 | D73.VDDPAD D73.VDD 129.35,82.3 v129.95,82.79 | D74.VDDPAD D74.VDD 128.46,86.04 v128.97,86.58 | D75.VDDPAD D75.VDD 127.25,89.73 v127.77,90.3 | D76.VDDPAD D76.VDD 125.86,93.34 v126.33,93.93 | D77.VDDPAD D77.VDD 124.27,96.84 v124.66,97.47 | D78.VDDPAD D78.VDD 122.37,100.27 v122.78,100.89 | D62.VDDPAD D62.VDD 120.4,103.51 v120.68,104.19 | D63.VDDPAD D63.VDD 118.11,106.74 v118.39,107.36 | D64.VDDPAD D64.VDD 115.7,109.54 v115.89,110.37 | D65.VDDPAD D65.VDD 113.09,112.33 v113.22,113.22 | D66.VDDPAD D66.VDD 110.3,115.06 v110.37,115.89 | D67.VDDPAD D67.VDD 107.31,117.6 v107.36,118.39 | D68.VDDPAD D68.VDD 104.14,119.89 v104.19,120.68 | D69.VDDPAD D69.VDD 100.9,122.05 v100.89,122.78 | D70.VDDPAD D70.VDD 97.54,123.95 v97.47,124.66 | D79.VDDPAD D79.VDD 93.98,125.6 v93.93,126.33 | D80.VDDPAD D80.VDD 90.36,127.06 v90.3,127.77 | D81.VDDPAD D81.VDD 86.68,128.27 v86.58,128.97 | D82.VDDPAD D82.VDD 83.06,129.22 v82.79,129.95 | D83.VDDPAD D83.VDD 79.18,129.98 v78.95,130.68 | D84.VDDPAD D84.VDD 75.31,130.49 v75.07,131.17 | D85.VDDPAD D85.VDD 71.56,130.68 v71.17,131.41 | D86.VDDPAD D86.VDD 67.63,130.75 v67.26,131.41 | D87.VDDPAD D87.VDD 63.82,130.56 v63.36,131.17 | D88.VDDPAD D88.VDD 59.94,130.11 v59.48,130.68 | D89.VDDPAD D89.VDD 56.13,129.41 v55.64,129.95 | D90.VDDPAD D90.VDD 52.45,128.46 v51.85,128.97 | D91.VDDPAD D91.VDD 48.7,127.32 v48.13,127.77 | D92.VDDPAD D92.VDD 45.09,125.92 v44.5,126.33
  Top 0.203: D93.VDDPAD D93.VDD 41.53,124.27 v40.96,124.66 | D94.VDDPAD D94.VDD 38.16,122.37 v37.54,122.78 | D95.VDDPAD D95.VDD 34.99,120.4 v34.24,120.68 | D96.VDDPAD D96.VDD 31.75,118.11 v31.07,118.39 | D97.VDDPAD D97.VDD 28.77,115.63 v28.06,115.89 | D98.VDDPAD D98.VDD 26.04,113.03 v25.21,113.22 | D99.VDDPAD D99.VDD 23.24,110.3 v22.54,110.37 | D100.VDDPAD D100.VDD 20.83,107.25 v20.04,107.36 | D101.VDDPAD D101.VDD 18.54,104.14 v17.75,104.19 | D102.VDDPAD D102.VDD 16.51,100.97 v15.65,100.89 | D103.VDDPAD D103.VDD 14.54,97.54 v13.77,97.47 | D104.VDDPAD D104.VDD 12.89,93.98 v12.1,93.93 | D105.VDDPAD D105.VDD 11.43,90.36 v10.66,90.3 | D106.VDDPAD D106.VDD 10.16,86.74 v9.46,86.58 | D107.VDDPAD D107.VDD 9.27,83.12 v8.48,82.79 | D108.VDDPAD D108.VDD 8.45,79.18 v7.75,78.95 | D109.VDDPAD D109.VDD 7.94,75.31 v7.26,75.07 | D110.VDDPAD D110.VDD 7.68,71.63 v7.02,71.17 | D111.VDDPAD D111.VDD 7.68,67.69 v7.02,67.26 | D112.VDDPAD D112.VDD 7.87,63.88 v7.26,63.36 | D113.VDDPAD D113.VDD 8.38,60.01 v7.75,59.48 | D114.VDDPAD D114.VDD 9.08,56.2 v8.48,55.64 | D115.VDDPAD D115.VDD 9.97,52.52 v9.46,51.85 | D116.VDDPAD D116.VDD 11.18,48.77 v10.66,48.13 | D117.VDDPAD D117.VDD 12.51,45.21 v12.1,44.5 | D118.VDDPAD D118.VDD 14.16,41.72 v13.77,40.96 | D119.VDDPAD D119.VDD 16,38.29 v15.65,37.54 | D120.VDDPAD D120.VDD 18.03,34.99 v17.75,34.24 | D121.VDDPAD D121.VDD 20.32,31.75 v20.04,31.07 | D122.VDDPAD D122.VDD 22.73,28.89 v22.54,28.06 | D123.VDDPAD D123.VDD 25.4,26.04 v25.21,25.21 | D124.VDDPAD D124.VDD 28.13,23.37 v28.06,22.54 | D125.VDDPAD D125.VDD 31.12,20.89 v31.07,20.04 | D126.VDDPAD D126.VDD 34.29,18.54 v34.24,17.75
  Top 0.203: D127.VDDPAD D127.VDD 37.46,16.51 v37.54,15.65 | D128.VDDPAD D128.VDD 40.83,14.61 v40.96,13.77 | D129.VDDPAD D129.VDD 44.45,12.83 v44.5,12.1 | D130.VDDPAD D130.VDD 48.01,11.43 v48.13,10.66 | D131.VDDPAD D131.VDD 51.75,10.16 v51.85,9.46 | D132.VDDPAD D132.VDD 55.37,9.21 v55.64,8.48 | D133.VDDPAD D133.VDD 59.25,8.51 v59.48,7.75 | D134.VDDPAD D134.VDD 62.99,8 v63.36,7.26 | D135.VDDPAD D135.VDD 66.86,7.75 v67.26,7.02 | D136.VDDPAD D136.VDD 70.74,7.68 v71.17,7.02 | D137.VDDPAD D137.VDD 74.61,7.94 v75.07,7.26 | D138.VDDPAD D138.VDD 78.42,8.38 v78.95,7.75 | D139.VDDPAD D139.VDD 82.3,9.14 v82.79,8.48 | D140.VDDPAD D140.VDD 85.98,10.03 v86.58,9.46 | D141.VDDPAD D141.VDD 89.6,11.18 v90.3,10.66 | D142.VDDPAD D142.VDD 93.15,12.57 v93.93,12.1 | D143.VDDPAD D143.VDD 96.71,14.16 v97.47,13.77 | D144.VDDPAD D144.VDD 100.14,16 v100.89,15.65 | D145.VDDPAD D145.VDD 103.38,18.03 v104.19,17.75 | D146.VDDPAD D146.VDD 106.55,20.26 v107.36,20.04 | D147.VDDPAD D147.VDD 109.6,22.73 v110.37,22.54 | D148.VDDPAD D148.VDD 112.4,25.34 v113.22,25.21 | D149.VDDPAD D149.VDD 115.06,28.13 v115.89,28.06 | D150.VDDPAD D150.VDD 117.54,31.05 v118.39,31.07 | D151.VDDPAD D151.VDD 119.82,34.23 v120.68,34.24 | D152.VDDPAD D152.VDD 121.92,37.46 v122.78,37.54 | D153.VDDPAD D153.VDD 123.89,40.83 v124.66,40.96 | D154.VDDPAD D154.VDD 125.48,44.32 v126.33,44.5 | D155.VDDPAD D155.VDD 126.94,47.88 v127.77,48.13 | D156.VDDPAD D156.VDD 128.21,51.62 v128.97,51.85 | D157.VDDPAD D157.VDD 129.22,55.37 v129.95,55.64 | D158.VDDPAD D158.VDD 129.92,59.05 v130.52,59.32
  Bottom 0.203: v131.41,71.17 J9.P$2
  pour Bottom: 5.71,69.22 arc-90 69.22,132.72 arc-270
GND  (via drill 0.3)
  Bottom 0.178: v78.99,59.69 J3.P$1
  Bottom 0.508: v76.77,61.72 77.6,61.79 J3.P$1 | v78.74,74.04 79.69,73.72 J1.P$1
  pour Top: 69.22,83.57 arc90 54.86,69.22 arc90 69.22,54.86 arc90 83.57,69.22 arc90
GND1  (via drill 0.3)  (1 unrouted)
  Top 0.203: D21.GND 94.3,67.75 94.04,67.56
  Bottom 0.152: v90.74,60.2 v92.58,59.37
  Bottom 0.406: J8.P$1 92.52,62.67 91.57,62.17 v90.74,60.2 | v92.33,56.45 v89.15,57.09
  Bottom 0.508: J5.P$1 v94.81,75.31
  pour Top: 69.22,96.27 arc90 42.16,69.22 arc270 69.28,96.27 arc179
GND2  (via drill 0.3, 0.35)
  Top 0.152: D127.GNDPAD 37.46,19 37.46,19.05
  Bottom 0.508: v131.25,75.12 J9.P$1 | J11.P$1 131.1,62.99 v130.37,63.37 v128.21,63.69
  pour Top: 132.72,69.22 arc90 69.22,132.72 arc270
N$1
  Top 0.178: D4.CKO D5.CKI
N$2  (via drill 0.3)
  Top 0.178: v81.66,67.25 81.28,67.63 D1.CKI
  Bottom 0.178: J2.P$2 81.92,67.5 v81.66,67.25
N$3  (via drill 0.3)
  Top 0.178: 80.45,68.34 D1.SDI 79.98,68.36 79.82,68.2 v79.82,67.75
  Bottom 0.178: v79.82,67.75 79.82,68.36 81.77,70.31 81.83,70.31 J2.P$1
N$4
  Top 0.178: D2.CKI D1.CKO
N$5
  Top 0.178: D1.SDO D2.SDI
N$6
  Top 0.178: D3.CKI D2.CKO
N$7
  Top 0.178: D2.SDO D3.SDI
N$8
  Top 0.178: D3.CKO D4.CKI
N$9
  Top 0.178: D4.SDI D3.SDO
N$10
  Top 0.178: D5.SDI D4.SDO
N$11
  Top 0.178: D6.CKI D5.CKO
N$12
  Top 0.178: D5.SDO D6.SDI
N$13
  Top 0.178: D6.CKO D7.CKI
N$14
  Top 0.178: D7.SDI D6.SDO
N$15
  Top 0.178: D7.CKO D8.CKI
N$16
  Top 0.178: D8.SDI D7.SDO
N$17
  Top 0.178: D8.CKO D9.CKI
N$18
  Top 0.178: D9.SDI D8.SDO
N$19
  Top 0.178: D9.CKO D10.CKI
N$20
  Top 0.178: D10.SDI D9.SDO
N$21
  Top 0.178: D10.CKO D11.CKI
N$22
  Top 0.178: D11.SDI D10.SDO
N$23
  Top 0.178: D12.CKI D11.CKO
N$24
  Top 0.178: D11.SDO D12.SDI
N$25
  Top 0.178: D12.CKO D13.CKI
N$26
  Top 0.178: D12.SDO D13.SDI
N$27
  Top 0.178: D14.CKI D13.CKO
N$28
  Top 0.178: D13.SDO D14.SDI
N$29
  Top 0.178: D14.CKO D15.CKI
N$30
  Top 0.178: D15.SDI D14.SDO
N$31
  Top 0.178: D15.CKO D16.CKI
N$32
  Top 0.178: D16.SDI D15.SDO
N$33
  Top 0.178: D16.CKO D17.CKI
N$34
  Top 0.178: D17.SDI D16.SDO
N$35
  Top 0.178: D18.CKI D17.CKO
N$36
  Top 0.178: D17.SDO D18.SDI
N$37
  Top 0.178: D19.CKI D18.CKO
N$38
  Top 0.178: D19.SDI D18.SDO
N$39
  Top 0.178: D20.CKI D19.CKO
N$40
  Top 0.178: D19.SDO D20.SDI
N$41  (via drill 0.3)
  Top 0.178: D20.CKO 81.15,66.86 v80.71,67.37
  Bottom 0.178: v80.71,67.37 80.52,66.8 80.58,66.61 J4.P$2
N$42  (via drill 0.3)
  Top 0.178: D20.SDO v79.5,66.93
  Bottom 0.178: J4.P$1 79.69,64.77 v79.5,66.93
N$43  (via drill 0.3)
  Top 0.152: D21.CKI 93.98,68.26 v93.22,67.5
  Bottom 0.152: J6.P$2 93.93,68.21 v93.22,67.5
N$44  (via drill 0.3)
  Top 0.152: v92.46,68.07 92.75,68.36 D21.SDI
  Bottom 0.152: v92.46,68.07 92.46,68.96 93.74,70.24 J6.P$1
N$45
  Top 0.203: D31.CKI D21.CKO
N$46
  Top 0.203: D31.SDI D21.SDO
N$47
  Top 0.203: D32.CKI D31.CKO
N$48
  Top 0.203: D32.SDI D31.SDO
N$49
  Top 0.203: D32.CKO D33.CKI
N$50
  Top 0.203: D33.SDI D32.SDO
N$51
  Top 0.203: D34.CKI D33.CKO
N$52
  Top 0.203: D34.SDI D33.SDO
N$53
  Top 0.203: D35.CKI D34.CKO
N$54
  Top 0.203: D34.SDO D35.SDI
N$55
  Top 0.203: D36.CKI D35.CKO
N$56
  Top 0.203: D36.SDI D35.SDO
N$57
  Top 0.203: D37.CKI D36.CKO
N$58
  Top 0.203: D36.SDO D37.SDI
N$59
  Top 0.203: D22.CKI D38.CKO
N$60
  Top 0.203: D38.SDO D22.SDI
N$61
  Top 0.203: D23.CKI D22.CKO
N$62
  Top 0.203: D22.SDO D23.SDI
N$63
  Top 0.203: D24.CKI D23.CKO
N$64
  Top 0.203: D23.SDO D24.SDI
N$65
  Top 0.203: D25.CKI D24.CKO
N$66
  Top 0.203: D24.SDO D25.SDI
N$67
  Top 0.203: D26.CKI D25.CKO
N$68
  Top 0.203: D25.SDO D26.SDI
N$69
  Top 0.203: D27.CKI D26.CKO
N$70
  Top 0.203: D26.SDO D27.SDI
N$71
  Top 0.203: D28.CKI D27.CKO
N$72
  Top 0.203: D27.SDO D28.SDI
N$73
  Top 0.203: D30.CKI D29.CKO
N$74
  Top 0.203: D29.SDO D30.SDI
N$75
  Top 0.203: D30.SDO D39.SDI
N$76
  Top 0.203: D40.CKI D39.CKO
N$77
  Top 0.203: D39.SDO D40.SDI
N$78
  Top 0.203: D39.CKI D30.CKO
N$79
  Top 0.203: D41.CKI D40.CKO
N$80
  Top 0.203: D40.SDO D41.SDI
N$81
  Top 0.203: D28.SDO D29.SDI
N$82
  Top 0.203: D29.CKI D28.CKO
N$83
  Top 0.203: D38.SDI D37.SDO
N$84
  Top 0.203: D41.CKO D42.CKI
N$85
  Top 0.203: D41.SDO D42.SDI
N$86
  Top 0.203: D42.CKO D43.CKI
N$87
  Top 0.203: D42.SDO D43.SDI
N$88
  Top 0.203: D43.CKO D44.CKI
N$89
  Top 0.203: D44.SDI D43.SDO
N$90
  Top 0.203: D45.CKO D46.CKI
N$91
  Top 0.203: D46.SDI D45.SDO
N$92
  Top 0.203: D47.CKI D46.CKO
N$93
  Top 0.203: D46.SDO D47.SDI
N$94
  Top 0.203: D48.CKI D47.CKO
N$95
  Top 0.203: D47.SDO D48.SDI
N$96
  Top 0.203: D49.CKI D48.CKO
N$97
  Top 0.203: D48.SDO D49.SDI
N$98
  Top 0.203: D49.CKO D50.CKI
N$99
  Top 0.203: D50.SDI D49.SDO
N$100
  Top 0.203: D51.CKI D50.CKO
N$101
  Top 0.203: D50.SDO D51.SDI
N$102
  Top 0.203: D52.CKI D51.CKO
N$103
  Top 0.203: D51.SDO D52.SDI
N$104
  Top 0.203: D53.CKO D54.CKI
N$105
  Top 0.203: D54.SDI D53.SDO
N$106
  Top 0.203: D54.CKO D55.CKI
N$107
  Top 0.203: D55.SDI D54.SDO
N$108
  Top 0.203: D56.CKI D55.CKO
N$109
  Top 0.203: D56.SDI D55.SDO
N$110
  Top 0.203: D56.CKO D57.CKI
N$111
  Top 0.203: D57.SDI D56.SDO
N$112
  Top 0.203: D58.CKI D57.CKO
N$113
  Top 0.203: D58.SDI D57.SDO
N$114
  Top 0.203: D58.CKO D59.CKI
N$115
  Top 0.203: D59.SDI D58.SDO
N$116
  Top 0.203: D60.CKI D59.CKO
N$117
  Top 0.203: D59.SDO D60.SDI
N$118
  Top 0.203: D38.CKI D37.CKO
N$119
  Top 0.203: D45.CKI D44.CKO
N$120
  Top 0.203: D44.SDO D45.SDI
N$121
  Top 0.203: D53.SDI D52.SDO
N$122
  Top 0.203: D52.CKO D53.CKI
N$123  (via drill 0.3)
  Top 0.203: D61.CKI 129.92,67.82 v130.43,67.31
  Bottom 0.203: J10.P$2 131.44,67.5 131.25,67.31 v130.43,67.31
N$124  (via drill 0.3)
  Top 0.203: D61.SDI 128.82,68.36 v128.4,67.95
  Bottom 0.203: v128.4,67.95 128.4,68.71 129.87,70.18 130.18,70.18 | 130.18,70.18 J10.P$1 | 130.18,70.18
N$125
  Top 0.203: D71.CKI D61.CKO
N$126
  Top 0.203: D71.SDI D61.SDO
N$127
  Top 0.203: D71.CKO D72.CKI
N$128
  Top 0.203: D72.SDI D71.SDO
N$129
  Top 0.203: D72.CKO D73.CKI
N$130
  Top 0.203: D73.SDI D72.SDO
N$131
  Top 0.203: D74.CKI D73.CKO
N$132
  Top 0.203: D74.SDI D73.SDO
N$133  (via drill 0.3)
  Top 0.152: D60.CKO 94.55,66.91 v94.55,67.18
  Bottom 0.152: J7.P$2 94.93,66.8 v94.55,67.18
N$134  (via drill 0.3)
  Top 0.152: v92.33,66.36 D60.SDO
  Bottom 0.152: J7.P$1 92.96,64.45 92.14,65.34 v92.33,66.36
N$135
  Top 0.203: D75.CKI D74.CKO
N$136
  Top 0.203: D75.SDI D74.SDO
N$137
  Top 0.203: D75.CKO D76.CKI
N$138
  Top 0.203: D76.SDI D75.SDO
N$139
  Top 0.203: D77.CKI D76.CKO
N$140
  Top 0.203: D76.SDO D77.SDI
N$141
  Top 0.203: D62.CKI D78.CKO
N$142
  Top 0.203: D78.SDO D62.SDI
N$143
  Top 0.203: D62.CKO D63.CKI
N$144
  Top 0.203: D63.SDI D62.SDO
N$145
  Top 0.203: D64.CKI D63.CKO
N$146
  Top 0.203: D63.SDO D64.SDI
N$147
  Top 0.203: D65.CKI D64.CKO
N$148
  Top 0.203: D65.SDI D64.SDO
N$149
  Top 0.203: D66.CKI D65.CKO
N$150
  Top 0.203: D66.SDI D65.SDO
N$151
  Top 0.203: D67.CKI D66.CKO
N$152
  Top 0.203: D66.SDO D67.SDI
N$153
  Top 0.203: D67.CKO D68.CKI
N$154
  Top 0.203: D67.SDO D68.SDI
N$155
  Top 0.203: D69.CKO D70.CKI
N$156
  Top 0.203: D70.SDI D69.SDO
N$157
  Top 0.203: D79.SDI D70.SDO
N$158
  Top 0.203: D79.CKO D80.CKI
N$159
  Top 0.203: D80.SDI D79.SDO
N$160
  Top 0.203: D70.CKO D79.CKI
N$161
  Top 0.203: D77.CKO D78.CKI
N$162
  Top 0.203: D78.SDI D77.SDO
N$163
  Top 0.203: D69.SDI D68.SDO
N$164
  Top 0.203: D68.CKO D69.CKI
N$165
  Top 0.203: D81.CKO D82.CKI
N$166
  Top 0.203: D82.SDI D81.SDO
N$167
  Top 0.203: D82.CKO D83.CKI
N$168
  Top 0.203: D83.SDI D82.SDO
N$169
  Top 0.203: D83.CKO D84.CKI
N$170
  Top 0.203: D84.SDI D83.SDO
N$171
  Top 0.203: D84.CKO D85.CKI
N$172
  Top 0.203: D85.SDI D84.SDO
N$173
  Top 0.203: D85.CKO D86.CKI
N$174
  Top 0.203: D86.SDI D85.SDO
N$175
  Top 0.203: D86.CKO D87.CKI
N$176
  Top 0.203: D87.SDI D86.SDO
N$177
  Top 0.203: D87.CKO D88.CKI
N$178
  Top 0.203: D88.SDI D87.SDO
N$179
  Top 0.203: D89.CKO D90.CKI
N$180
  Top 0.203: D90.SDI D89.SDO
N$181
  Top 0.203: D90.CKO D91.CKI
N$182
  Top 0.203: D91.SDI D90.SDO
N$183
  Top 0.203: D91.CKO D92.CKI
N$184
  Top 0.203: D92.SDI D91.SDO
N$185
  Top 0.203: D92.CKO D93.CKI
N$186
  Top 0.203: D93.SDI D92.SDO
N$187
  Top 0.203: D93.CKO D94.CKI
N$188
  Top 0.203: D94.SDI D93.SDO
N$189
  Top 0.203: D95.CKI D94.CKO
N$190
  Top 0.203: D94.SDO D95.SDI
N$191
  Top 0.203: D96.CKI D95.CKO
N$192
  Top 0.203: D95.SDO D96.SDI
N$193
  Top 0.203: D97.CKO D98.CKI
N$194
  Top 0.203: D98.SDI D97.SDO
N$195
  Top 0.203: D99.SDI D98.SDO
N$196
  Top 0.203: D100.CKI D99.CKO
N$197
  Top 0.203: D99.SDO D100.SDI
N$198
  Top 0.203: D98.CKO D99.CKI
N$199
  Top 0.203: D88.CKO D89.CKI
N$200
  Top 0.203: D89.SDI D88.SDO
N$201
  Top 0.203: D96.SDO D97.SDI
N$202
  Top 0.203: D97.CKI D96.CKO
N$203
  Top 0.203: D102.CKI D101.CKO
N$204
  Top 0.203: D101.SDO D102.SDI
N$205
  Top 0.203: D102.CKO D103.CKI
N$206
  Top 0.203: D103.SDI D102.SDO
N$207
  Top 0.203: D103.CKO D104.CKI
N$208
  Top 0.203: D103.SDO D104.SDI
N$209
  Top 0.203: D104.CKO D105.CKI
N$210
  Top 0.203: D105.SDI D104.SDO
N$211
  Top 0.203: D105.CKO D106.CKI
N$212
  Top 0.203: D105.SDO D106.SDI
N$213
  Top 0.203: D106.CKO D107.CKI
N$214
  Top 0.203: D106.SDO D107.SDI
N$215
  Top 0.203: D107.CKO D108.CKI
N$216
  Top 0.203: D108.SDI D107.SDO
N$217
  Top 0.203: D109.CKO D110.CKI
N$218
  Top 0.203: D110.SDI D109.SDO
N$219
  Top 0.203: D110.CKO D111.CKI
N$220
  Top 0.203: D110.SDO D111.SDI
N$221
  Top 0.203: D111.CKO D112.CKI
N$222
  Top 0.203: D111.SDO D112.SDI
N$223
  Top 0.203: D112.CKO D113.CKI
N$224
  Top 0.203: D112.SDO D113.SDI
N$225
  Top 0.203: D113.CKO D114.CKI
N$226
  Top 0.203: D113.SDO D114.SDI
N$227
  Top 0.203: D114.CKO D115.CKI
N$228
  Top 0.203: D114.SDO D115.SDI
N$229
  Top 0.203: D115.CKO D116.CKI
N$230
  Top 0.203: D115.SDO D116.SDI
N$231
  Top 0.203: D117.CKO D118.CKI
N$232
  Top 0.203: D117.SDO D118.SDI
N$233
  Top 0.203: D118.SDO D119.SDI
N$234
  Top 0.203: D119.CKO D120.CKI
N$235
  Top 0.203: D119.SDO D120.SDI
N$236
  Top 0.203: D118.CKO D119.CKI
N$237
  Top 0.203: D108.CKO D109.CKI
N$238
  Top 0.203: D108.SDO D109.SDI
N$239
  Top 0.203: D116.SDO D117.SDI
N$240
  Top 0.203: D116.CKO D117.CKI
N$241
  Top 0.203: D121.CKO D122.CKI
N$242
  Top 0.203: D122.SDI D121.SDO
N$243
  Top 0.203: D122.CKO D123.CKI
N$244
  Top 0.203: D122.SDO D123.SDI
N$245
  Top 0.203: D124.CKI D123.CKO
N$246
  Top 0.203: D123.SDO D124.SDI
N$247
  Top 0.203: D125.CKI D124.CKO
N$248
  Top 0.203: D124.SDO D125.SDI
N$249
  Top 0.203: D126.CKI D125.CKO
N$250
  Top 0.203: D125.SDO D126.SDI
N$251
  Top 0.203: D126.CKO D127.CKI
N$252
  Top 0.203: D127.SDI D126.SDO
N$253
  Top 0.203: D128.CKI D127.CKO
N$254
  Top 0.203: D127.SDO D128.SDI
N$255
  Top 0.203: D130.CKI D129.CKO
N$256
  Top 0.203: D129.SDO D130.SDI
N$257
  Top 0.203: D130.CKO D131.CKI
N$258
  Top 0.203: D131.SDI D130.SDO
N$259
  Top 0.203: D132.CKI D131.CKO
N$260
  Top 0.203: D131.SDO D132.SDI
N$261
  Top 0.203: D132.CKO D133.CKI
N$262
  Top 0.203: D133.SDI D132.SDO
N$263
  Top 0.203: D134.CKI D133.CKO
N$264
  Top 0.203: D133.SDO D134.SDI
N$265
  Top 0.203: D134.CKO D135.CKI
N$266
  Top 0.203: D135.SDI D134.SDO
N$267
  Top 0.203: D136.CKI D135.CKO
N$268
  Top 0.203: D135.SDO D136.SDI
N$269
  Top 0.203: D137.CKO D138.CKI
N$270
  Top 0.203: D137.SDO D138.SDI
N$271
  Top 0.203: D139.SDI D138.SDO
N$272
  Top 0.203: D139.CKO D140.CKI
N$273
  Top 0.203: D139.SDO D140.SDI
N$274
  Top 0.203: D138.CKO D139.CKI
N$275
  Top 0.203: D129.CKI D128.CKO
N$276
  Top 0.203: D128.SDO D129.SDI
N$277
  Top 0.203: D137.SDI D136.SDO
N$278
  Top 0.203: D136.CKO D137.CKI
N$279
  Top 0.203: D80.CKO D81.CKI
N$280
  Top 0.203: D81.SDI D80.SDO
N$281
  Top 0.203: D101.CKI D100.CKO
N$282
  Top 0.203: D100.SDO D101.SDI
N$283
  Top 0.203: D120.CKO D121.CKI
N$284
  Top 0.203: D120.SDO D121.SDI
N$285
  Top 0.203: D141.CKO D142.CKI
N$286
  Top 0.203: D142.SDI D141.SDO
N$287
  Top 0.203: D142.CKO D143.CKI
N$288
  Top 0.203: D142.SDO D143.SDI
N$289
  Top 0.203: D144.CKI D143.CKO
N$290
  Top 0.203: D143.SDO D144.SDI
N$291
  Top 0.203: D145.CKI D144.CKO
N$292
  Top 0.203: D144.SDO D145.SDI
N$293
  Top 0.203: D145.CKO D146.CKI
N$294
  Top 0.203: D145.SDO D146.SDI
N$295
  Top 0.203: D147.CKI D146.CKO
N$296
  Top 0.203: D146.SDO D147.SDI
N$297
  Top 0.203: D147.CKO D148.CKI
N$298
  Top 0.203: D147.SDO D148.SDI
N$299
  Top 0.203: D149.CKO D150.CKI
N$300
  Top 0.203: D149.SDO D150.SDI
N$301
  Top 0.203: D150.CKO D151.CKI
N$302
  Top 0.203: D151.SDI D150.SDO
N$303
  Top 0.203: D152.CKI D151.CKO
N$304
  Top 0.203: D151.SDO D152.SDI
N$305
  Top 0.203: D153.CKI D152.CKO
N$306
  Top 0.203: D152.SDO D153.SDI
N$307
  Top 0.203: D154.CKI D153.CKO
N$308
  Top 0.203: D154.SDI D153.SDO
N$309
  Top 0.203: D155.CKI D154.CKO
N$310
  Top 0.203: D155.SDI D154.SDO
N$311
  Top 0.203: D155.CKO D156.CKI
N$312
  Top 0.203: D156.SDI D155.SDO
N$313
  Top 0.203: D158.CKI D157.CKO
N$314
  Top 0.203: D158.SDI D157.SDO
N$315
  Top 0.203: D159.SDI D158.SDO
N$316
  Top 0.203: D159.CKO D160.CKI
N$317
  Top 0.203: D159.SDO D160.SDI
N$318
  Top 0.203: D159.CKI D158.CKO
N$319
  Top 0.203: D148.CKO D149.CKI
N$320
  Top 0.203: D149.SDI D148.SDO
N$321
  Top 0.203: D157.SDI D156.SDO
N$322
  Top 0.203: D156.CKO D157.CKI
N$323  (via drill 0.3)
  Top 0.203: v128.33,66.29 128.34,66.3 D160.SDO
  Bottom 0.203: v128.33,66.29 128.33,65.66 129.71,64.28 J12.P$1
N$324  (via drill 0.3)
  Top 0.203: D160.CKO 129.85,67 v129.54,67.31
  Bottom 0.203: v129.54,67.31 129.54,66.74 129.97,66.31 J12.P$2
N$325
  Top 0.203: D141.CKI D140.CKO
N$326
  Top 0.203: D140.SDO D141.SDI

## Text on the board
Bottom: v01 | v01 | v01